# Altium PCB HighPowerBiPolarStepperMotorDriver.PcbDoc
Units mil, origin at the board's own origin, x right, y up, seen from the top; angles counter-clockwise.
Board outline 6000 x 6000 mil, 2 copper layers (Top Layer, Bottom Layer); 67 components, 45 nets, 204 pads, 58 vias.
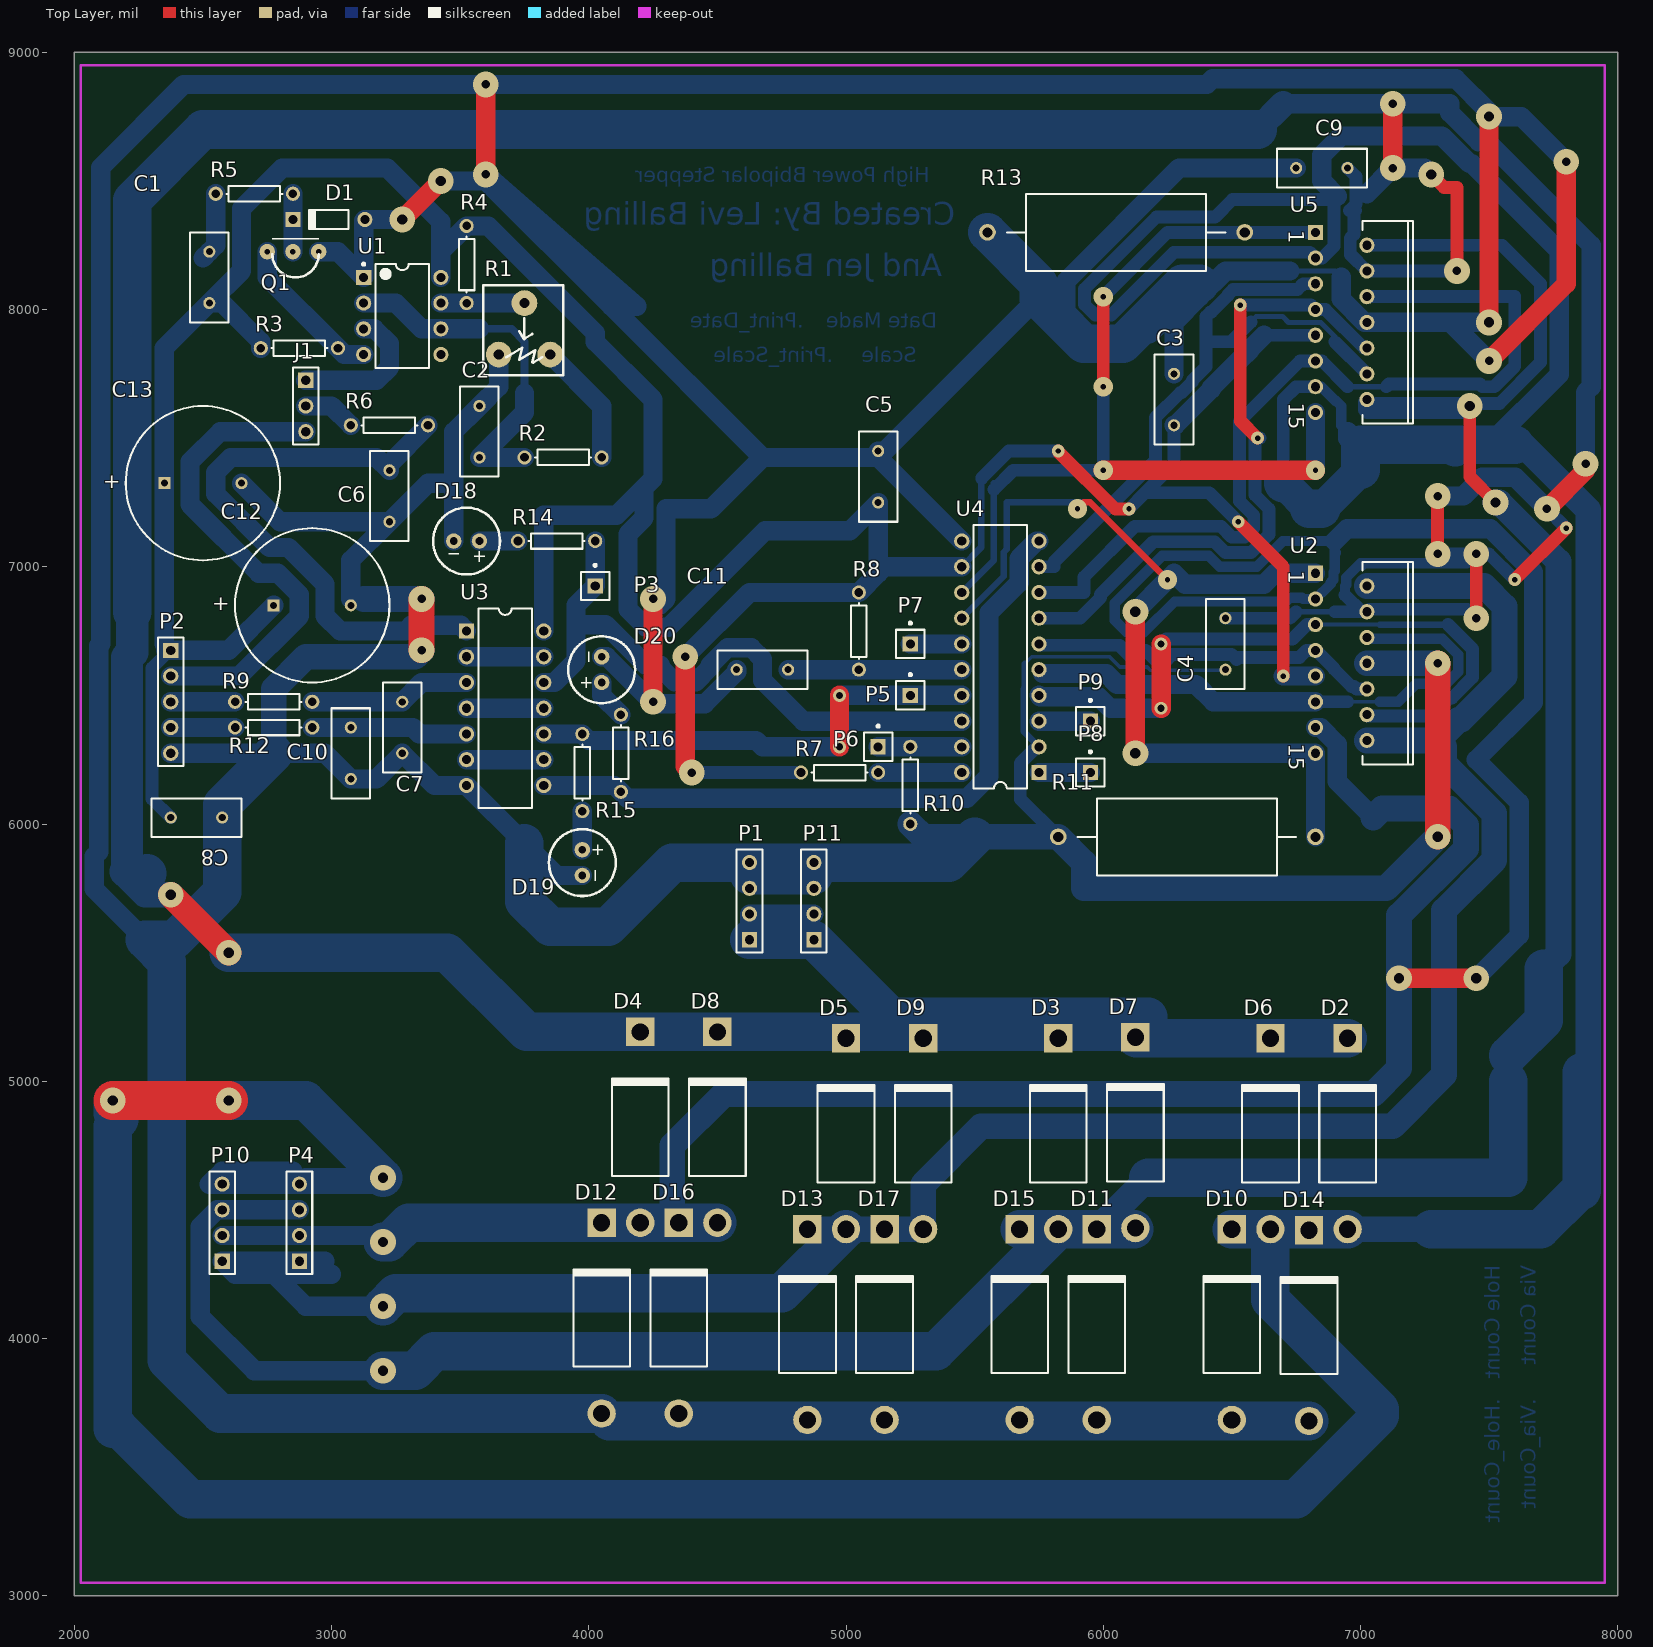
[diagram p0: Top Layer view]
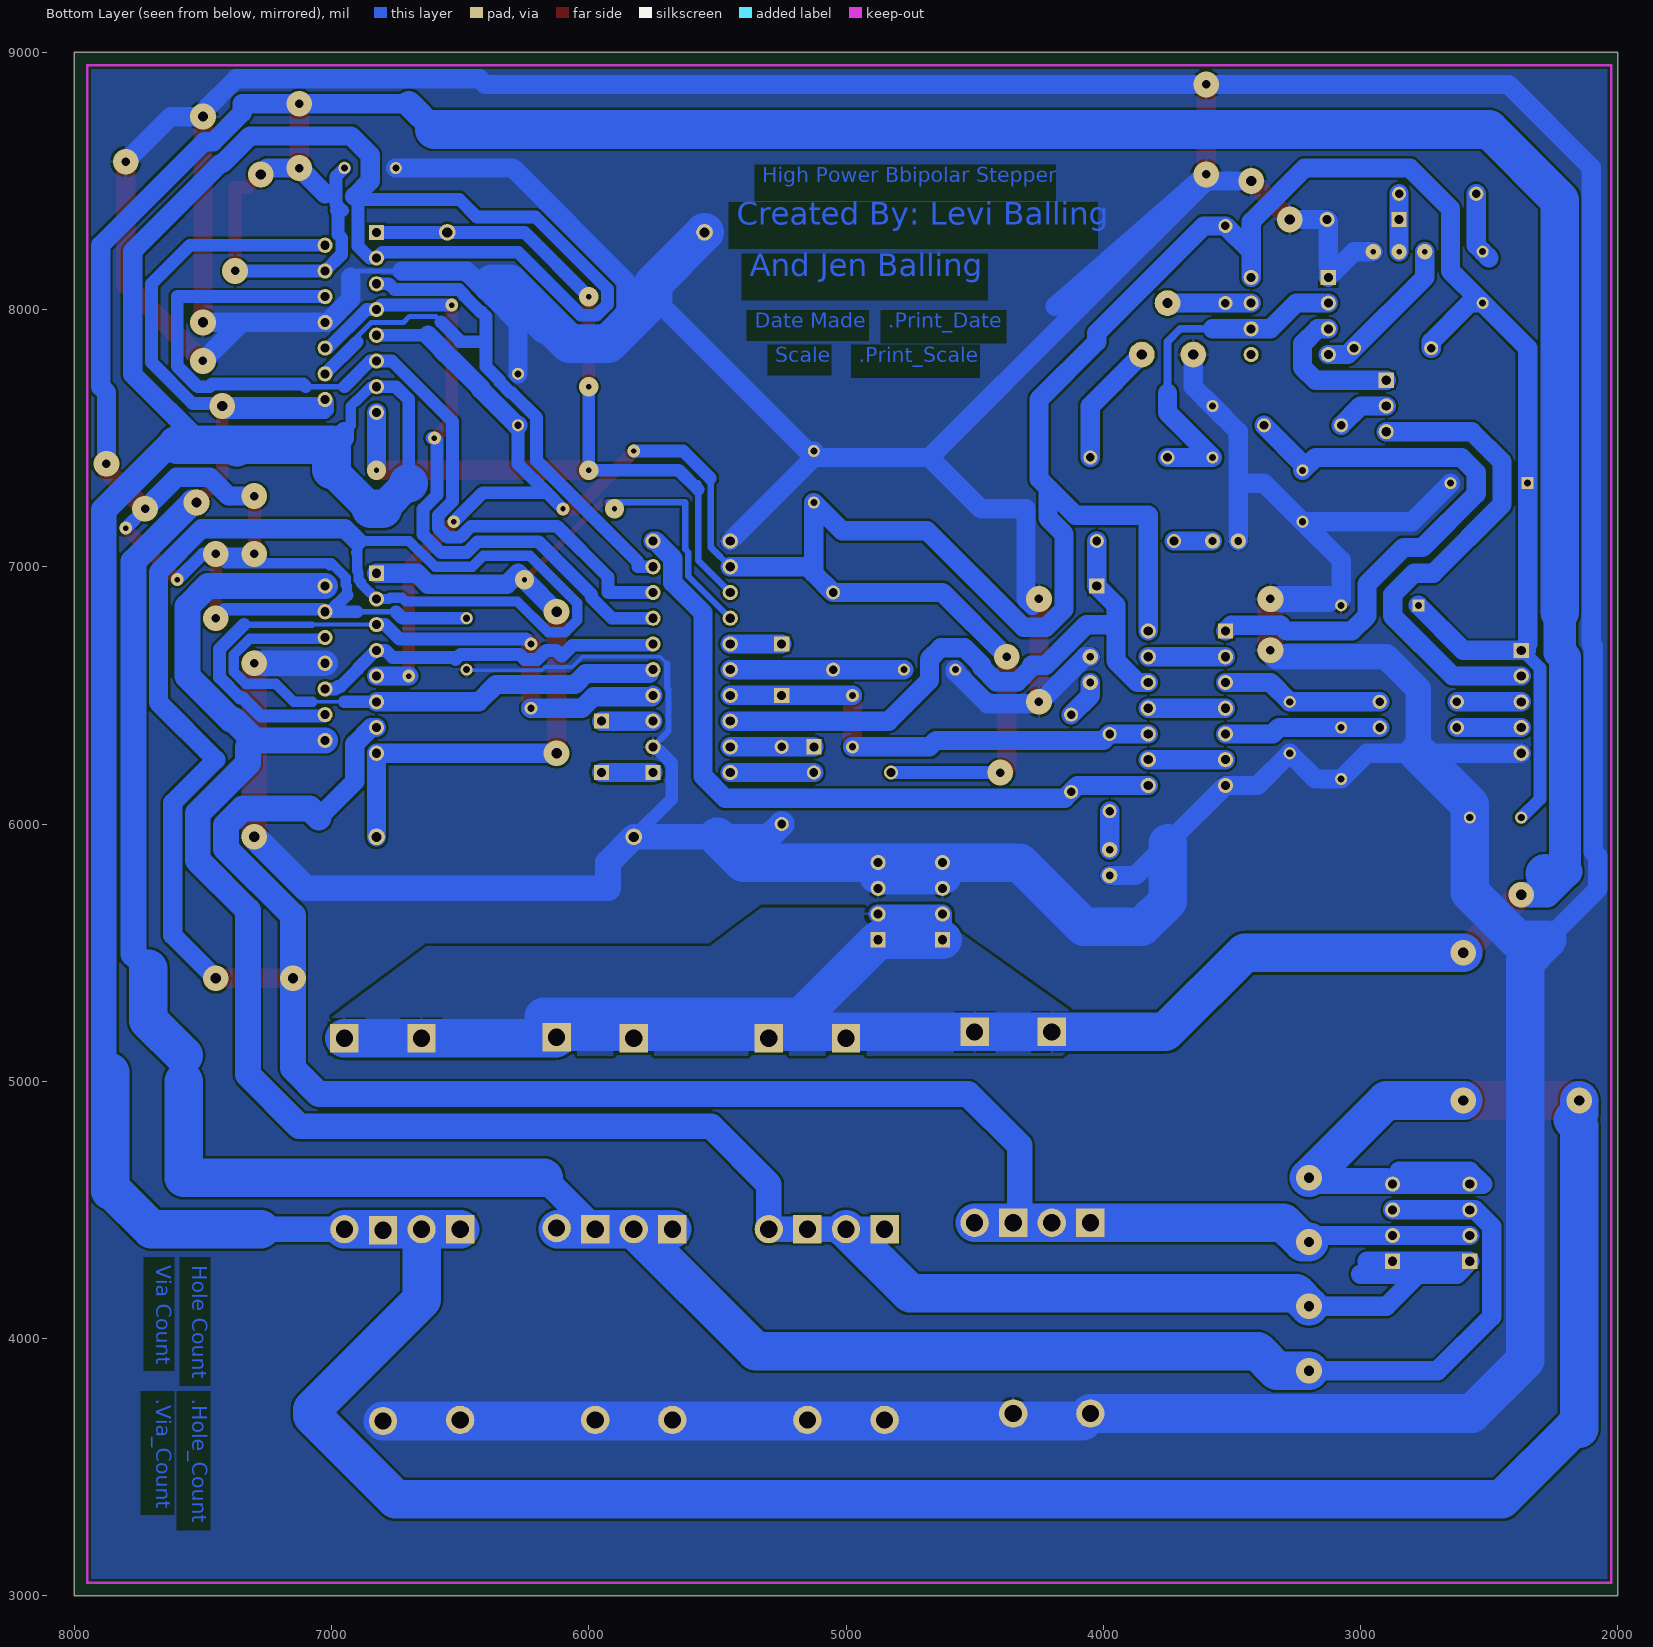
[diagram p1: Bottom Layer view, seen from below]

## Layer stack, top to bottom
Top Layer: signal copper 1.4
Dielectric: dielectric 12.6, FR-4, Dk 4.8
Bottom Layer: signal copper 1.4

## Board outline
2000,3000 8000,3000 8000,9000 2000,9000

## Design rules (kind name [scope] priority, off if disabled: settings)
Clearance Power_Clearance_require [(InNet('COIL1APOWER') OR InNet('COIL1BPOWER') OR InNet('COIL2CPOWER') OR InNet('COIL2DPOWER') OR InNet('+12V-36V'))] p1: gap=10
Clearance [All] p2: gap=10
PlaneClearance "Ground plane" [InNet('GND')] p1: clearance=30
PlaneClearance [All] p2: clearance=20
PolygonConnect [All] p1: connectstyle=Relief reliefconductorwidth=10 reliefentries=4 polygonreliefangle="90 Angle"
RoomDefinition HighPowerBiPolarStepperMotorSchem [InComponentClass('HighPowerBiPolarStepperMotorSchem')] p1: confinementstyle=ConfineIn formatcopy=TRUE lockcomponents=FALSE outline 7950,3055 2025,3055 2025,8950 7950,8950
RoutingVias [All] p1: holewidth=32 width=75 viastyle="Through Hole" minholewidth=21 minwidth=20 maxholewidth=250 maxwidth=200
SilkscreenOverComponentPads [All] p1: minsilkscreentomaskgap=10
SolderMaskExpansion [All] p1: expansion=4
Width [All] p1: maxlimit=150 minlimit=5 preferedwidth=25 bottomlayer_minwidth=15 minimp=50.000000 maximp=50.000000 favimp=50.000000
26 further rules are at their usual default settings.

## Classes and differential pairs
net class PowerClass: +12V-36V COIL1APOWER COIL1BPOWER COIL2CPOWER COIL2DPOWER

## Components (designator, comment, footprint, x,y, rotation, side; value= is the part's Value field where it differs from the comment)
C1 "Cap" RAD-0.2 2525,8125 r270 top
C2 "Cap" RAD-0.2 3575,7525 r270 top
C3 "Cap" RAD-0.2 6275,7650 r270 top
C4 "Cap" RAD-0.2 6475,6700 r90 top
C5 "Cap" RAD-0.2 5125,7350 r270 top
C6 "Cap" RAD-0.2 3225,7275 r90 top
C7 "Cap" RAD-0.2 3275,6375 r90 top
C8 "Cap" RAD-0.2 2475,6025 r180 top
C9 "Cap" RAD-0.2 6850,8550 r0 top
C10 "Cap" RAD-0.2 3075,6275 r90 top
C11 "Cap" RAD-0.2 4675,6600 r0 top
C12 "Cap Pol1" RB7.6-15 2925,6850 r180 top
C13 "Cap Pol1" RB7.6-15 2500,7325 r180 top
D1 "Diode 1N4148" DO-35 2989.76,8350 r180 top
D2 "Diode 1N5402" DO-201AD 6950,4795.87 r90 top
D3 "Diode 1N5402" DO-201AD 5825,4795.87 r90 top
D4 "Diode 1N5402" DO-201AD 4200,4820.87 r90 top
D5 "Diode 1N5402" DO-201AD 5000,4795.87 r90 top
D6 "Diode 1N5402" DO-201AD 6650,4795.87 r90 top
D7 "Diode 1N5402" DO-201AD 6125,4800 r90 top
D8 "Diode 1N5402" DO-201AD 4500,4820.87 r90 top
D9 "Diode 1N5402" DO-201AD 5300,4795.87 r90 top
D10 "Diode 1N5402" DO-201AD 6500,4054.13 r90 top
D11 "Diode 1N5402" DO-201AD 5975,4054.13 r90 top
D12 "Diode 1N5402" DO-201AD 4050,4079.13 r90 top
D13 "Diode 1N5402" DO-201AD 4850,4054.13 r90 top
D14 "Diode 1N5402" DO-201AD 6800,4050 r90 top
D15 "Diode 1N5402" DO-201AD 5675,4054.13 r90 top
D16 "Diode 1N5402" DO-201AD 4350,4079.13 r90 top
D17 "Diode 1N5402" DO-201AD 5150,4054.13 r90 top
D18 "LED_White" LED 3575,7100 r180 top
D19 "LED_White" LED 3975,5900 r270 top
D20 "LED_White" LED 4050,6550 r90 top
J1 "Jumper 3" HDR1X3 2900,7725 r270 top
P1 "Header 4" HDR1X4 4625,5550 r90 top
P2 "Header 5" HDR1X5 2375,6675 r270 top
P3 "PP" PIN1 4025,6925 r0 top
P4 "Header 4" HDR1X4 2875,4300 r90 top
P5 "PP" PIN1 5250,6500 r0 top
P6 "PP" PIN1 5125,6300 r0 top
P7 "PP" PIN1 5250,6700 r0 top
P8 "PP" PIN1 5950,6200 r0 top
P9 "PP" PIN1 5950,6400 r0 top
P10 "Header 4" HDR1X4 2575,4300 r90 top
P11 "Header 4" HDR1X4 4875,5550 r90 top
Q1 "2N3904" 2N3904 2950,8225 r180 top
R1 "RPot" Variable_Resistor 3650,7825 r0 top
R2 "Res1" AXIAL-0.3 3900,7425 r0 top
R3 "Res1" AXIAL-0.3 2875,7850 r0 top
R4 "Res1" AXIAL-0.3 3525,8175 r90 top
R5 "Res1" AXIAL-0.3 2700,8450 r0 top
R6 "Res1" AXIAL-0.3 3225,7550 r0 top
R7 "Res1" AXIAL-0.3 4975,6200 r180 top
R8 "Res1" AXIAL-0.3 5050,6750 r270 top
R9 "Res1" AXIAL-0.3 2775,6475 r0 top
R10 "Res1" AXIAL-0.3 5250,6150 r270 top
R11 "Res1" AXIAL-1.0 6325,5950 r0 top
R12 "Res1" AXIAL-0.3 2775,6375 r180 top
R13 "Res1" AXIAL-1.0 6050,8300 r0 top
R14 "Res1" AXIAL-0.3 3875,7100 r180 top
R15 "Res1" AXIAL-0.3 3975,6200 r270 top
R16 "Res1" AXIAL-0.3 4125,6275 r90 top
U1 "LM555CN" N08E 3275,7975 r0 top
U2 "L298N" Multiwatt15V 6925,6625 r270 top
U3 "SN7416N" N014 3675,6450 r270 top
U4 "L297" DIP20 5600,6650 r90 top
U5 "L298N" Multiwatt15V 6925,7950 r270 top

## Footprints (in the part's own frame and the unit in brackets; to place one, negate y for a bottom-side part, rotate by r counter-clockwise, add the part's x,y. Pads: shape width x height; smd on the part's side, far side on the other; paste and mask are expansions set on the pad)
2N3904 [mil] "simple transistor, but bigger holes and pads"
  round 60 hole 21: 1(0,0) 2(100,0) 3(200,0)
  silkscreen extent 0,-50 180,100
AXIAL-0.3 [mm] "Axial Device, Thru-Hole; 2 Leads; 0.3 in Pin Spacing"
  round 1.4 hole 0.85: 1(-3.81,0) 2(3.81,0)
  silkscreen extent -2.77,-0.76 2.77,0.76
AXIAL-1.0 [mm] "Axial Device, Thru-Hole; 2 Leads; 1.0 in Pin Spacing"
  round 1.65 hole 1: 1(-12.7,0) 2(12.7,0)
  silkscreen extent -10.79,-3.81 10.79,3.81
DIP20 [mm] "DIP; 20 Leads; Row Spacing 7.62 mm; Pitch 2.54 mm"
  rect 1.5x1.5 hole 0.9: 1(-11.43,-3.81)
  round 1.5 hole 0.9: 2(-8.89,-3.81) 3(-6.35,-3.81) 4(-3.81,-3.81) 5(-1.27,-3.81) 6(1.27,-3.81) 7(3.81,-3.81) 8(6.35,-3.81) 9(8.89,-3.81) 10(11.43,-3.81) 11(11.43,3.81) 12(8.89,3.81) 13(6.35,3.81) 14(3.81,3.81) 15(1.27,3.81) 16(-1.27,3.81) 17(-3.81,3.81) 18(-6.35,3.81) 19(-8.89,3.81) 20(-11.43,3.81)
  silkscreen extent -13,-2.65 13,2.65
DO-35 [mm] "Diode, Axial; Body 3.8 x 1.9 mm (LxDia. max), Lead Dia. 0.53 mm (max)"
  round 1.5 hole 0.9: 1(-3.55,0)
  rect 1.5x1.5 hole 0.9: 2(3.55,0)
  silkscreen extent -1.95,-0.95 2.05,0.95
DO-201AD [mm] "Diode, Axial; Body 9.5 x 5.6 mm (LxDia. max), Lead Dia. 1.32 mm (max)"
  round 2.8 hole 1.7: 1(-9.42,0)
  rect 2.8x2.8 hole 1.7: 2(9.42,0)
  silkscreen extent -4.8,-2.8 4.9,2.8
HDR1X3 [mm] "Connector; Header; 3 Position"
  rect 1.5x1.5 hole 0.9: 1(0,0)
  round 1.5 hole 0.9: 2(2.54,0) 3(5.08,0)
  silkscreen extent -1.27,-1.27 6.35,1.27
HDR1X4 [mm] "Connector; Header; 4 Position"
  rect 1.5x1.5 hole 0.9: 1(0,0)
  round 1.5 hole 0.9: 2(2.54,0) 3(5.08,0) 4(7.62,0)
  silkscreen extent -1.27,-1.27 8.89,1.27
HDR1X5 [mm] "Connector; Header; 5 Position"
  rect 1.5x1.5 hole 0.9: 1(0,0)
  round 1.5 hole 0.9: 2(2.54,0) 3(5.08,0) 4(7.62,0) 5(10.16,0)
  silkscreen extent -1.27,-1.27 11.43,1.27
LED [mil] "standard 5mm LED"
  round 60 hole 30: 1(0,0) 2(100,0)
  silkscreen extent -80,-130 180,130
Multiwatt15V [mm] "TO, Thru-Hole, Vertical, Heatsink Mounted; 15 Bent Staggered Leads; Pitch 1.27 mm"
  rect 1.5x1.5 hole 0.9: 1(-8.89,-2.54)
  round 1.5 hole 0.9: 2(-7.62,2.54) 3(-6.35,-2.54) 4(-5.08,2.54) 5(-3.81,-2.54) 6(-2.54,2.54) 7(-1.27,-2.54) 8(0,2.54) 9(1.27,-2.54) 10(2.54,2.54) 11(3.81,-2.54) 12(5.08,2.54) 13(6.35,-2.54) 14(7.62,2.54) 15(8.89,-2.54)
  silkscreen extent -10,2.09 10,7.09
N08E [mm] "DIP, 8-Leads, Row Spacing 7.62mm, Pitch 2.54mm, Body 9.91x6.35mm"
  rect 1.5x1.5 hole 0.9: 1(-3.81,3.81)
  round 1.5 hole 0.9: 2(-3.81,1.27) 3(-3.81,-1.27) 4(-3.81,-3.81) 5(3.81,-3.81) 6(3.81,-1.27) 7(3.81,1.27) 8(3.81,3.81)
  silkscreen extent -3.93,-5.15 2.65,5.23, body extent -3.6,-5.15 3.6,5.15, height 5.34
N014 [mm] "DIP; 14 Leads; Row Spacing 7.62 mm; Pitch 2.54 mm"
  rect 1.5x1.5 hole 0.9: 1(-7.62,-3.81)
  round 1.5 hole 0.9: 2(-5.08,-3.81) 3(-2.54,-3.81) 4(0,-3.81) 5(2.54,-3.81) 6(5.08,-3.81) 7(7.62,-3.81) 8(7.62,3.81) 9(5.08,3.81) 10(2.54,3.81) 11(0,3.81) 12(-2.54,3.81) 13(-5.08,3.81) 14(-7.62,3.81)
  silkscreen extent -9.85,-2.65 9.85,2.65
PIN1 [mm] "Connector; Plug"
  rect 1.5x1.5 hole 0.9: 1(0,0)
  silkscreen extent -1.4,-1.4 1.4,2.17
RAD-0.2 [mm] "Radial Cap, Thru-Hole; 2 Leads; 0.2 in Pin Spacing"
  round 1.2 hole 0.7: 1(-2.54,0) 2(2.54,0)
  silkscreen extent -4.44,-1.91 4.44,1.91
RB7.6-15 [mm] "Polarized Capacitor (Radial); 2 Leads"
  rect 1.2x1.2 hole 0.7: 1(3.81,0)
  round 1.2 hole 0.7: 2(-3.81,0)
  silkscreen extent -7.62,-7.62 7.62,7.62
Variable_Resistor [mil] "Tayda Variable Resistor"
  round 100 hole 40: 1(200,0) 2(0,0) 3(100,200)
  silkscreen extent -60,-80 250,270

## Part data
C1 C2 C3 C4 C5 C6 C7 C8 C9 C10 C11: "Capacitor"
C12 C13: "Polarized Capacitor (Radial)"
D1: "High Conductance Fast Diode"
D2 D3 D4 D5 D6 D7 D8 D9 D10 D11 D12 D13 D14 D15 D16 D17: "3 Amp General Purpose Rectifier"
D18 D19 D20: library part LED0, "Typical INFRARED GaAs LED"
J1: library part "Header 3", "Header, 3-Pin"
P1 P4 P10 P11: "Header, 4-Pin"
P2: "Header, 5-Pin"
P3 P5 P6 P7 P8 P9: library part Plug, "Plug"
Q1: "NPN General Purpose Amplifier"
R1: "Potentiometer"
R2 R3 R4 R5 R6 R7 R8 R9 R10 R11 R12 R13 R14 R15 R16: "Resistor"
U1: "Timer"
U2 U5: "Dual Full Bridge Driver"
U3: "Hex Inverter Buffer / Driver with High-Voltage Outputs"
U4: "Stepper Motor Controller"

## Via types
v1: diameter 100, hole 33, Top Layer to Bottom Layer, 20 vias
v2: diameter 100, hole 40, Top Layer to Bottom Layer, 20 vias
v3: diameter 50, hole 21, Top Layer to Bottom Layer, 8 vias
v4: diameter 75, hole 21, Top Layer to Bottom Layer, 6 vias
v5: diameter 50, hole 28, Top Layer to Bottom Layer, 4 vias

## Nets (pads, with @x,y where several pads share a name; then routed paths per layer and width w, separated by ;. In a path a pad name is that pad's centre, name@x,y a point inside that pad or via, vN(x,y) a via of type N, cw(c..) or ccw(c..) an arc to the next point about the centre after c; other vN are vias at no path point)
+5: C1.2 C3.2 C5.2 C8.2 C12.1 C13.1 P2.1 R3.1 R4.2 R7.2 R8.1 U1.8 U2.9 U3.14 U4.12 U5.9 | length 14386.7
  Top Layer w50: v3(5825,7450) 5825,7447.47 6047.47,7225 v3(6100,7225) ; v3(6524.87,7174.87) 6700,6999.73 v3(6700,6575)
  Top Layer w75: v1(4375,6650) 4375,6225 v1(4400,6200)
  Bottom Layer w25: U4.12 5525,7075 5525,7325
  Bottom Layer w50: P2.1@2354.79,6675 2354.79,6658.84 2302.5,6606.55 2302.5,6097.5 C8.2 ; v1(4400,6200) R7.2 ; 5527.5,7342.43 5527.5,7344.68 5632.82,7450 v3(5825,7450) ; v3(6100,7225) 6162.5,7287.5 ; C3.2 6275,7400 6162.5,7287.5 ; v3(6524.87,7174.87) 6412.23,7287.5 6162.5,7287.5 ; 6625,7900 U5.9
  Bottom Layer w75: P2.1@2354.79,6675 P2.1 ; R3.1 2725,7875 2575,8025 C1.2 ; C12.1 2600,6675 P2.1 ; U1.8 3425,8225 ; U3.14 3825,7200 4107.84,7200 4250,7342.16 ; v1(4375,6650) 4625,6900 R8.1 5125,6975 ; U4.12 5150,7000 5125,6975 ; C3.2 6280.06,7550 6420,7689.94 6420,7695 6527.5,7802.5 6530.03,7802.5 6572.5,7844.97 6572.5,7847.5 6625,7900 ; v3(6700,6575) U2.9 ; P2.1 2350,6700 C13.1 2350,7850 C1.2 ; C1.2 2650,8150 2650,8391.42 2808.58,8550 3216.42,8550 3425,8341.42 3425,8225 ; 3425,8225 R4.2 3609.1,8325 4025,7909.1 4025,7875 4250,7650 4250,7342.16 ; 4250,7342.16 4215,7307.16 4215,7189.79 4152.5,7127.29 4152.5,6834.61 4222.11,6765 4310.21,6765 4685.21,7140 5015,7140 C5.2 5125,6975
+12V-36V: C4.2 C9.2 D2.2 D3.2 D4.2 D5.2 D6.2 D7.2 D8.2 D9.2 P1.1 P1.2 P11.1 P11.2 U2.4 U5.4 | length 22206.5
  Top Layer w50: v2(7275,8525) 7325,8475 7375,8475 v1(7375,8150) ; v1(7300,7050) v1(7300,7275) ; v1(7450,6800) v1(7450,7050) ; v3(7600,6950) v3(7800,7150)
  Top Layer w75: v1(7125,8550) v1(7125,8800) ; v1(7725,7225) 7875,7375 v1(7875,7400)
  Top Layer w100: v2(2375,5725) v2(2600,5500)
  Bottom Layer w20: 6750,6825 6900,6825
  Bottom Layer w40: 6940,6889.79 6940,6923.83 6945,6928.83 6945,6958.14 7000,7013.14 ; 7008.14,7008.14 7008.14,7005 7000,7013.14 ; 7413.14,7013.14 7000,7013.14
  Bottom Layer w50: C4.2 6725,6800 6750,6825 ; 6900,6825 U2.4@7004.79,6825 ; 6940,6889.79 U2.4@7004.79,6825 ; C9.2 6982.5,8517.5 6982.5,8450 ; 7025,8450 6982.5,8450 ; v1(7300,7050) v1(7450,7050) 7500,7050 v3(7600,6950) ; v1(7375,8150) U5.4 6960.47,8214.53 6960.47,8276.73 6975,8291.26 6975,8378.68 6981.29,8384.97 6957.5,8384.97 6982.5,8409.97 6982.5,8450 ; v1(7450,6800) 7415,6835 7035,6835 U2.4 U2.4@7004.79,6825 ; v1(7725,7225) v3(7800,7150)
  Bottom Layer w75: P1.1 P1.2 P11.2 ; 6700,8800 v1(7125,8800) 7347.5,8800 7347.5,8764.61 7459.61,8652.5 7495,8652.5 7897.5,8250 7897.5,7700 7875,7677.5 v1(7875,7400) ; 7025,8450 v1(7125,8550) 7250,8550 v2(7275,8525) ; v1(7300,7275) 7400,7275 7472.5,7347.5 7602.5,7347.5 v1(7725,7225)
  Bottom Layer w100: 2192.5,5807.5 2275,5725 v2(2375,5725) ; 6600,8700 6700,8800
  Bottom Layer w125: 2200,5815 2205,5820 2205,6646.94 2225,6666.94 2225,6824.26
  Bottom Layer w150: 2225,6824.26 2225,8425 2500,8700 6600,8700 ; 2275,5800 2282.5,5807.5 ; v2(2600,5500) 3450,5500 3758.27,5191.73 D4.2 D8.2 6104.13,5191.73 D7.2 ; P1.1 P11.1 5175,5250 6175,5250 6175,5220.87 D7.2 ; D2.2 D6.2 6129.13,5166.73 D7.2
AUTO_CLOCK: J1.1 U1.3 | length 561.4
  Bottom Layer w75: J1.1 3175,7725 3225,7775 3225,7866.42 3166.42,7925 U1.3
CLOCK: J1.2 R6.1 | length 206.1
  Bottom Layer w75: J1.2 3000,7625 R6.1
CLOCKSIG: P3.1 R14.1 U3.12 U4.18 | length 2480.2
  Bottom Layer w75: U3.12 3866.42,6550 3950,6633.58 3950,6775 ; R14.1 P3.1 3950,6850 3950,6775 ; U4.18 4833.58,6400 4675,6558.58 4675,6641.42 4631.42,6685 4539.79,6685 4472.5,6617.71 4472.5,6609.61 4415.39,6552.5 4334.61,6552.5 4277.5,6609.61 4277.5,6617.71 4222.71,6617.71 4065.42,6775 3950,6775
COIL1APOWER: D5.1 D9.1 D13.2 D17.2 P4.1 P10.1 U2.2 U2.14 | length 9057.7
  Bottom Layer w75: 2725,4300 2900,4125 v2(3200,4125) ; 2975,4300 P4.1 P10.1 2625,4250 3000,4250
  Bottom Layer w100: D13.2 D5.1 D17.2 D9.1 5300,4600 5525,4825 7125,4825 7325,5025 7325,5663.87 7520,5858.87 7520,6041.13 7325,6236.13 7325,6300 ; U2.14 7300,6325 7380,6405 7391.13,6405 7560,6573.87 7560,6845.56 7480.56,6925 U2.2
  Bottom Layer w150: v2(3200,4125) 3250,4175 4750,4175 D5.1
COIL1ASIGNAL: U2.5 U2.12 U4.4 | length 2604.3
  Top Layer w75: v5(6225,6450) v5(6225,6700)
  Bottom Layer w15: U2.5 7075,6775
  Bottom Layer w25: 7075,6775 7340.92,6775
  Bottom Layer w50: v5(6225,6700) 6243.62,6718.62 6735.13,6718.62 6791.51,6775 U2.5 ; U2.12@7030,6420 7274.79,6420 7344.79,6490 7355.92,6490 7435,6569.08 7435,6680.92 7340.92,6775
  Bottom Layer w75: U4.4 5755,6495 5981.23,6495 6026.23,6450 v5(6225,6450)
COIL1BPOWER: D4.1 D8.1 D12.2 D16.2 P4.2 P10.2 U2.3 U2.13 | length 12500.8
  Top Layer w75: v2(7150,5400) v2(7450,5400)
  Bottom Layer w40: U2.3 6777.78,6875 6772.78,6880 6727.22,6880 6712.08,6864.87 6278,6864.87 6158.14,6745 6091.86,6745 6045,6791.86 6045,6858.14 6229.36,7042.5 6409.74,7042.5 6452.38,6999.87 6597.35,6999.87 6697.49,7100 6900,7100 6900,7050 ; 6850,6900 6851.48,6900 6884.53,6933.05 6884.53,6939.07 6895,6949.54 6895,6978.85 6900,6983.85 6900,7050 ; 6905,7055 6900,7050
  Bottom Layer w75: P10.2 P4.2 ; 2625,4400 3175,4400 v2(3200,4375) ; U2.13 6845.21,6375 6910,6310.21 6910,6165 7050,6025 ; 6900,7100 6947.5,7147.5 7505.03,7147.5 7672.5,6980.03 7672.5,6472.5 7450,6250 7617.5,6082.5 7617.5,5567.5 v2(7450,5400)
  Bottom Layer w100: D16.2 4325,4475 4325,4750 4525,4950 7050,4950 7150,5050 v2(7150,5400) 7150,5644.44 7410,5904.44 7410,5995.56 7345.56,6060 7085,6060 7050,6025
  Bottom Layer w150: v2(3200,4375) 3225,4375 3300,4450 D12.2 D4.1 D16.2 D8.1
COIL1BSIGNAL: U2.7 U2.10 U4.6 | length 1412
  Bottom Layer w50: U4.6 5755,6695 6062.53,6695 6105.03,6652.5 6127.55,6675.02 6165.13,6675.02 6200.15,6640 6249.85,6640 6268.47,6658.62 6499.28,6658.62 6517.9,6640 6525.4,6647.5 6762.4,6647.5 6789.9,6675 U2.7 6827.53,6675 6897.5,6605.03 6897.5,6602.5 6965,6535 6974.85,6535 6984.85,6525 U2.10
COIL2CPOWER: D3.1 D7.1 D11.2 D15.2 P4.3 P10.3 U5.2 U5.14 | length 14303.1
  Top Layer w50: v2(7425,7625) 7425,7350 v2(7525,7250)
  Bottom Layer w50: U5.2 7550,8250 7700,8100 7700,7794.94 7540.06,7635 v2@7425,7635 ; U5.14@7035,7640 U5.14 7015,7640 7015,7610 7025,7600 v2@7390,7600 ; 7050,7625 7060,7635 7375,7635 ; v2(7425,7625) v2@7425,7600 ; 7375,7635 v2@7425,7635 ; 7375,7635 v2@7400,7610 ; v2@7390,7600 v2@7410,7600 ; v2@7390,7600 v2@7400,7610 ; v2@7400,7610 v2@7425,7635 ; v2@7400,7610 v2@7410,7600 ; v2@7410,7600 v2@7425,7600 ; v2@7425,7600 v2@7425,7635
  Bottom Layer w75: P4.3 P10.3 2554.79,4500 2490,4435.21 2490,4085 2700,3875 v2(3200,3875)
  Bottom Layer w100: D11.2 6175,4625 6200,4650 7525,4650 7575,4700 7575,5100 7725,5250 7725,5425 7712.5,5437.5 7770,5495 7770,7020.42 7540.42,7250 v2(7525,7250)
  Bottom Layer w150: v2(3200,3875) 3325,3875 3400,3950 5350,3950 D3.1 ; D15.2 D3.1 ; D7.1@6120.87,4425 D11.2 D3.1 ; 6175,4625 7575,4625 7575,5000 ; 7575,5100 7712.5,5237.5 7712.5,5437.5
COIL2CSIGNAL: U4.7 U5.7 U5.10 | length 2592.4
  Top Layer w50: v3(6532.71,8017.29) 6532.71,7567.29 v3(6600,7500)
  Bottom Layer w50: U4.7 5909.85,6800 5990,6880.15 5990,6892.78 6194.72,7097.5 6432.53,7097.5 6475.16,7054.87 6574.57,7054.87 6644.87,7125.16 6644.87,7224.57 6590,7279.44 6590,7492.78 6597.22,7500 v3(6600,7500) v3@6609.85,7500 ; v3(6532.71,8017.29) 6532.92,8017.5 6807.5,8017.5 U5.7 6863.54,8000 7013.54,7850 U5.10
COIL2DPOWER: D2.1 D6.1 D10.2 D14.2 P4.4 P10.4 U5.3 U5.13 | length 22568.9
  Top Layer w150: v2(2150,4925) v2(2600,4925)
  Bottom Layer w40: U5.13 6847.22,7700 6902.22,7645 6905,7645 6925,7625 6925,7550 6950,7525
  Bottom Layer w50: 6700,7325 6700,7650 6750,7700 U5.13 ; 6910,8440 6897.5,8427.5 ; 6897.5,8427.5 6502.5,8427.5 6435,8360 6207.47,8360 5927.5,8080.03 5927.5,8019.97 5969.97,7977.5 6030.03,7977.5 6275.03,8222.5 6802.5,8222.5 U5.3 6851.23,8200 6897.5,8246.27 6897.5,8427.5
  Bottom Layer w75: 2850,4650 2575,4650 2525,4600 P10.4 P4.4 ; 6910,8440 6850,8500 6850,8600.58 6924.42,8675 7316.91,8675 7424.41,8567.5 7432.5,8567.5 7772.5,8227.5 7772.5,7747.5 7500,7475 6975,7475 6950,7500 6950,7525 ; P4.4 3175,4600 v2(3200,4625) 2900,4625 P4.4
  Bottom Layer w100: D2.1 7700,4425 7860,4585 7860,5010 7885,5035 7885,7220.56 7630.56,7475 7600,7475
  Bottom Layer w125: 6701.76,7325 6801.76,7225 ; 6848.24,7225 7000,7376.76
  Bottom Layer w150: v2(2150,4925) 2150,4875 2175,4850 2150,4825 2150,3650 2175,3650 2450,3375 6750,3375 7075,3700 7075,3725 6650,4150 D6.1 ; v2(2600,4925) 2900,4925 v2(3200,4625) ; D10.2 D6.1 ; 6700,7325 6701.76,7325 ; 6801.76,7225 6848.24,7225 ; D2.1 D6.1 ; 7000,7376.76 7000,7475 7359.08,7475 7369.08,7465 7379.08,7475 7500,7475 7600,7475 ; 7275,4425 7700,4425 7850,4575 7860,4575 7860,5010 7860,5035
COIL2DSIGNAL: U4.9 U5.5 U5.12 | length 2529
  Bottom Layer w20: 6573.73,7951.27 6594.97,7972.5 6697.5,7972.5 6720.47,7949.53 6845.52,7949.53 6900,7895.04 6900,7875
  Bottom Layer w50: U4.9 5807.9,7000 5807.9,7017.76 6202.5,7412.35 6202.5,7580.03 6299.97,7677.5 6305.03,7677.5 6347.5,7719.97 6347.5,7725.03 6400,7777.53 6400,7875 ; 6573.73,7951.27 6500,7877.53 6500,7875 6400,7875 ; U5.5 6777.53,8100 6755.03,8077.5 6505.03,8077.5 6485,8057.47 6485,8054.44 6420.56,7990 6417.53,7990 6400,7972.47 6400,7875 ; 6900,7875 U5.12
CW/CCW: P2.3 R9.1 | length 250
  Bottom Layer w75: P2.3 R9.1
CW/CCWSIGNAL: P5.1 R15.1 U3.10 U4.17 | length 1845.7
  Top Layer w75: v5(4975,6300) v5(4975,6500)
  Bottom Layer w75: U3.10 R15.1 4000,6325 4650,6325 4675,6300 v5(4975,6300) ; v5(4975,6500) P5.1 U4.17
GND: C2.1 C3.1 C4.1 C5.1 C6.1 C7.1 C8.1 C9.1 C10.1 C11.1 C12.2 C13.2 D1.1 D10.1 D11.1 D12.1 D13.1 D14.1 D15.1 D16.1 D17.1 D18.2 D19.2 D20.2 P1.3 P1.4 P2.5 P11.3 P11.4 Q1.1 R1.2 R10.2 R11.1 R13.1 U1.1 U2.8 U3.7 U4.2 U4.11 U5.8 | length 44155.9
  Top Layer w75: v2(3275,8350) v2(3425,8500) ; v1(3600,8525) v1(3600,8875) ; v1(4250,6475) v1(4250,6875) ; v1(7500,7800) 7800,8100 v1(7800,8575) ; v2(7500,7950) v2(7500,8750)
  Top Layer w100: v1(3350,6675) v1(3350,6875) ; v2(7300,5950) v1(7300,6625)
  Bottom Layer w15: 5695,6622.78 5722.22,6650 6024.22,6650 6064.22,6610 6170.04,6610 6182.54,6597.5 6472.5,6597.5 C4.1
  Bottom Layer w20: 6725,8150 6900,8150 6925,8125
  Bottom Layer w25: 5695,6622.78 5695,6529.85 5690,6524.85 5690,6360 U4.2
  Bottom Layer w50: U4.2 5741.45,6300 5677.5,6236.05 5677.5,6097.5 R11.1
  Bottom Layer w75: 2275,5550 2077.5,5747.5 2077.5,5875 2095,5892.5 2095,6692.5 2102.5,6700 2102.5,8552.5 2425,8875 v1(3600,8875) ; P2.5 2775,6275 2975,6275 C10.1 3175,6175 C7.1 3400,6150 U3.7 3750,5925 3875,5800 D19.2 ; C13.2 2800,7175 C6.1 ; Q1.1 3025,8225 U1.1 3125,8345.47 D1.1 v2(3275,8350) ; 3075,6875 3075,7025 C6.1 ; v2(3425,8500) 3600,8500 4087.5,8012.5 ; D18.2 3475,7325 ; v1(3600,8525) 4187.5,8012.5 4087.5,8012.5 ; R1.2 3650,7700 C2.1 3475,7525 3475,7325 ; D20.2 4070.21,6650 4252.71,6467.5 4450.59,6467.5 4575,6591.91 C11.1 ; v1(4250,6875) 4275,6850 4300,6875 4300,7225 4475,7225 4675,7425 ; 4750,8875 v1(3600,8875) ; C5.1 5125,7425 ; U4.11 5125,7425 ; 5750,8100 5750,8050 5125,7425 ; C3.1 6275,7950 6375,8050 ; 6725,8150 6475,8150 6375,8050 ; C9.1 6294.94,8550 5855,8110.06 5855,7989.94 5939.94,7905 6180,7905 6375,8100 6375,8050 ; 6925,8125 6925,8041.07 7016.07,7950 U5.8 7350,7950 ; v1(7500,7800) 7350,7950 ; v2(7500,7950) 7350,7950 ; v1(7800,8575) 7625,8750 v2(7500,8750) 7500,8767.71 7370.21,8897.5 6425,8897.5 6402.5,8875 v1(3600,8875) ; C6.1 3375,7325 3475,7325 ; 4087.5,8012.5 4675,7425 ; 4675,7425 5125,7425
  Bottom Layer w100: 2775,6275 2775,6525 2900,6650 3325,6650 v1(3350,6675) ; 3125,6875 v1(3350,6875) ; R10.2 5300,5950 5500,5950 R11.1 5925,5850 5925,5750 7100,5750 v2(7300,5950) ; U2.8 v1(7300,6625)
  Bottom Layer w150: 2775,6275 2575,6075 C8.1 2575,5734.08 2390.92,5550 2275,5550 2360,5465 2360,3915 2566.73,3708.27 D12.1 4079.13,3679.13 D14.1 ; 3750,5925 3750,5700 3850,5600 4075,5600 4325,5850 P1.4 ; 4875,5800 4625,5800 P1.4 ; 5500,5950 5400,5850 P11.4 P1.4 ; R13.1 5750,8100 5750,8041.91 5924.41,7867.5 6075.59,7867.5 6308.09,8100 6375,8100
MOTORENABLE: P2.4 R12.2 | length 250
  Bottom Layer w75: P2.4 R12.2
MOTORENABLESIGNAL: R16.1 U3.8 U4.10 | length 2787
  Bottom Layer w75: U3.8 4100,6150 R16.1 4150,6100 5470.21,6100 5556.25,6186.04 5556.25,6821.4 5672.97,6938.12 5672.97,7031.91 5741.07,7100 U4.10
NetC1_1: C1.1 R5.1 | length 270.7
  Bottom Layer w75: 2500,8200 C1.1 2550,8250 R5.1
NetC2_2: C2.2 R2.1 U1.2 U1.6 | length 1384.6
  Bottom Layer w30: 3575,7925 3700,7925 3750,7875 3750,7675
  Bottom Layer w75: U1.2 3250,8025 3350,7925 3394.85,7925 U1.6 3575,7925 ; R2.1 C2.2 3750,7600 3750,7675
NetC6_2: C6.2 R6.2 U3.1 | length 2327.4
  Bottom Layer w75: R6.2 3225,7400 C6.2 3175,7425 2608.58,7425 2550,7366.42 2550,7283.58 2758.58,7075 2832.84,7075 2975,6932.84 2975,6808.58 3033.58,6750 3287.11,6750 3309.61,6772.5 3502.5,6772.5 U3.1
NetC7_2: C7.2 R9.2 U3.3 | length 631.1
  Bottom Layer w75: R9.2 C7.2 3350,6550 U3.3
NetC10_2: C10.2 R12.1 U3.5 | length 610.4
  Bottom Layer w75: R12.1 C10.2 3316.42,6375 3341.42,6350 U3.5
NetC11_2: C11.2 R8.2 U4.16 | length 675
  Bottom Layer w75: C11.2 R8.2 U4.16
NetD1_2: D1.2 Q1.2 R5.2 | length 225
  Bottom Layer w75: Q1.2 D1.2 R5.2
NetD18_1: D18.1 R14.2 | length 150
  Bottom Layer w75: D18.1 R14.2
NetD19_1: D19.1 R15.2 | length 150
  Bottom Layer w75: D19.1 R15.2
NetD20_1: D20.1 R16.2 | length 156.1
  Bottom Layer w75: D20.1 4050,6500 R16.2
NetP6_1: P6.1 R10.1 U4.19 | length 325
  Bottom Layer w75: P6.1 R10.1 U4.19
NetP7_1: P7.1 U4.15 | length 200
  Bottom Layer w75: P7.1 U4.15
NetP8_1: P8.1 U4.1 | length 200
  Bottom Layer w75: U4.1 P8.1
NetP9_1: P9.1 U4.3 | length 200
  Bottom Layer w75: U4.3 P9.1
NetQ1_3: Q1.3 R3.2 U1.4 | length 599.3
  Bottom Layer w75: Q1.3 2750,8125 R3.2 3050,7825 U1.4
NetR1_1: R1.1 R2.2 | length 482.8
  Bottom Layer w75: R1.1 4050,7625 R2.2
NetR1_3: R1.3 R4.1 U1.7 | length 325
  Bottom Layer w75: U1.7 R4.1 R1.3
NetR7_1: R7.1 U4.20 | length 325
  Bottom Layer w75: R7.1 U4.20
NetU2_6: U2.6 U2.11 U4.5 | length 2179.2
  Bottom Layer w15: 6950,6475 7075,6475
  Bottom Layer w40: U2.6 7030,6720 7318.14,6720 7380,6658.14 7380,6591.86 7333.14,6545 7217.22,6545 7147.22,6475 7075,6475
  Bottom Layer w50: U4.5 U4.5@5764.93,6585.07 ; U2.11 6950,6475
  Bottom Layer w75: U4.5@5764.93,6585.07 6011.36,6585.07 6053.94,6542.5 6360.26,6542.5 6427.76,6475 U2.11
NetU3_2: U3.2 U3.13 | length 300
  Bottom Layer w75: U3.2 U3.13
NetU3_4: U3.4 U3.11 | length 300
  Bottom Layer w75: U3.4 U3.11
NetU3_6: U3.6 U3.9 | length 300
  Bottom Layer w75: U3.6 U3.9
NetU4_8: U4.8 U5.6 U5.11 | length 3541.7
  Bottom Layer w20: 6950,7700 7100,7700
  Bottom Layer w50: U4.8 5925,6900 5925,6959.85 6122.65,7157.5 6457.38,7157.5 6500.01,7114.87 6549.72,7114.87 6584.87,7150.01 6584.87,7199.72 6530,7254.58 6530,7564.85 6765.15,7800 U5.11 6850,7800 6950,7700 ; U5.6 7600,8050 7600,7779.79 7520.21,7700 7475,7700 7465,7710 7110,7710 7100,7700
SENSOR1: R11.2 U2.1 U2.15 U4.14 | length 3714.9
  Top Layer w25: v4(5900,7225) 5925,7250 5950,7250 v4(6250,6950)
  Top Layer w75: v2(6125,6275) v2(6125,6825)
  Bottom Layer w25: U4.14 5612.97,6962.97 5612.97,7056.76 5625,7068.79 5625,7250 5925,7250 v4(5900,7225)
  Bottom Layer w75: v2(6125,6275) U2.15 R11.2 ; v2(6125,6825) v4(6250,6950) 6275,6975 6317.63,6932.37 6625.31,6932.37 6667.95,6975 U2.1
SENSOR2: R13.2 U4.13 U5.1 U5.15 | length 3586.4
  Top Layer w50: v4(6000,7700) v4(6000,8050)
  Top Layer w75: v4(6000,7375) v4(6825,7375)
  Bottom Layer w25: U4.13 5575,7025 5575,7300 5575,7325
  Bottom Layer w50: 5575,7300 5650,7375 v4(6000,7375) v4(6000,7700) ; v4(6000,8050) 6250,8300 R13.2 U5.1
  Bottom Layer w75: v4(6825,7375) U5.15
UC_CLOCK: J1.3 P2.2 | length 1914.1
  Bottom Layer w75: P2.2 2641.42,6575 2875,6808.58 2875,6891.42 2791.42,6975 2717.16,6975 2450,7242.16 2450,7407.84 2567.16,7525 J1.3
VCC: 
pads on no net: U1.5

## Polygon pours and split planes (outlines as drawn)
GND on Bottom Layer "Power" (solid, pour order 6): 2025,8950 2025,3050 7950,3050 7950,8950
+12V-36V on Bottom Layer "Power" (solid, pour order 4): 4693.54,5675 5328.65,5675 5395.51,5625 5529.21,5525 5696.35,5525 6632.3,5525 6933.15,5300 7000,5250 7000,5100 4158.71,5100 4025,5200

## Keep-outs
Keep-Out Layer:
  lines w10: 2025,3050 2025,8950 7950,8950 7950,3050 2025,3050

## Other copper
Bottom Layer:
  text "High Power Bbipolar Stepper" at 5325,8475 h100
  text "Created By: Levi Balling" at 5425,8300 h150
  text "And Jen Balling" at 5375,8100 h150
  text ".Print_Date" at 4835,7910 h100
  text "Date Made" at 5355,7910 h100
  text ".Print_Scale" at 4950,7775 h100
  text "Scale" at 5275,7775 h100
  text "Hole Count" at 7560,4285 h100 r90
  text "Via Count" at 7700,4285 h100 r90
  text ".Hole_Count" at 7560,3765 h100 r90
  text ".Via_Count" at 7700,3765 h100 r90

## Silkscreen, mask and mechanical layers (free items; w line width, h text height)
Drill Drawing:
  text ".LEGEND" at 8155,3245 h60
  text "Drill Drawing." at 8200,3100 h60

## Dimensions
2025,3050 to 2025,8950 on Mechanical 1
2025,3050 to 7950,3050 on Mechanical 1

## Text inside footprints (layer, text, board x,y; h text height)
C12: Top Overlay "+" at 2604.85,6879.01 h59.06 r180
C13: Top Overlay "+" at 2179.85,7354.01 h59.06 r180
U2: Top Overlay "15" at 6721.65,6312.4 h59.06 r270; Top Overlay "1" at 6721.65,6984.06 h59.06 r270
U5: Top Overlay "15" at 6721.65,7637.4 h59.06 r270; Top Overlay "1" at 6721.65,8309.06 h59.06 r270